# Altium PCB BSPDPCB.PcbDoc
Units mm, origin at the board's own origin, x right, y up, seen from the top; angles counter-clockwise.
Board outline 65.79 x 36.96 mm, 4 copper layers (Top Layer, GND, +5, Bottom Layer), stack 0.603 mm thick; 63 components, 31 nets, 200 pads, 118 vias.
Unrouted connection lines stored in the file: 95.
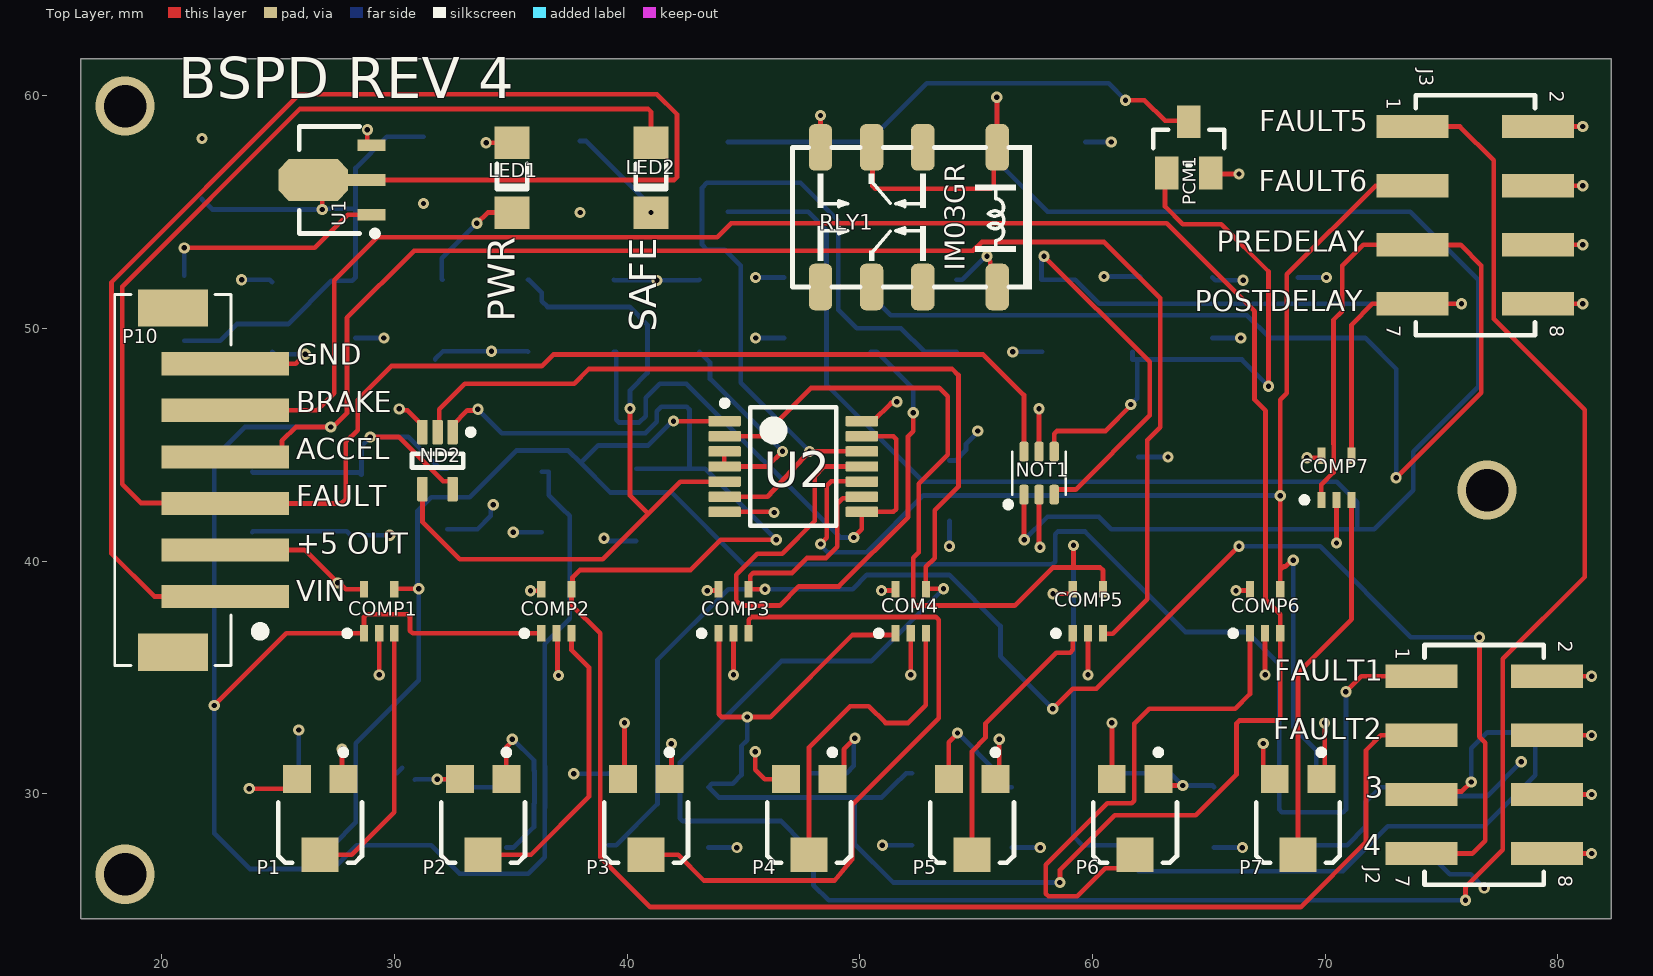
[diagram p0: Top Layer view]
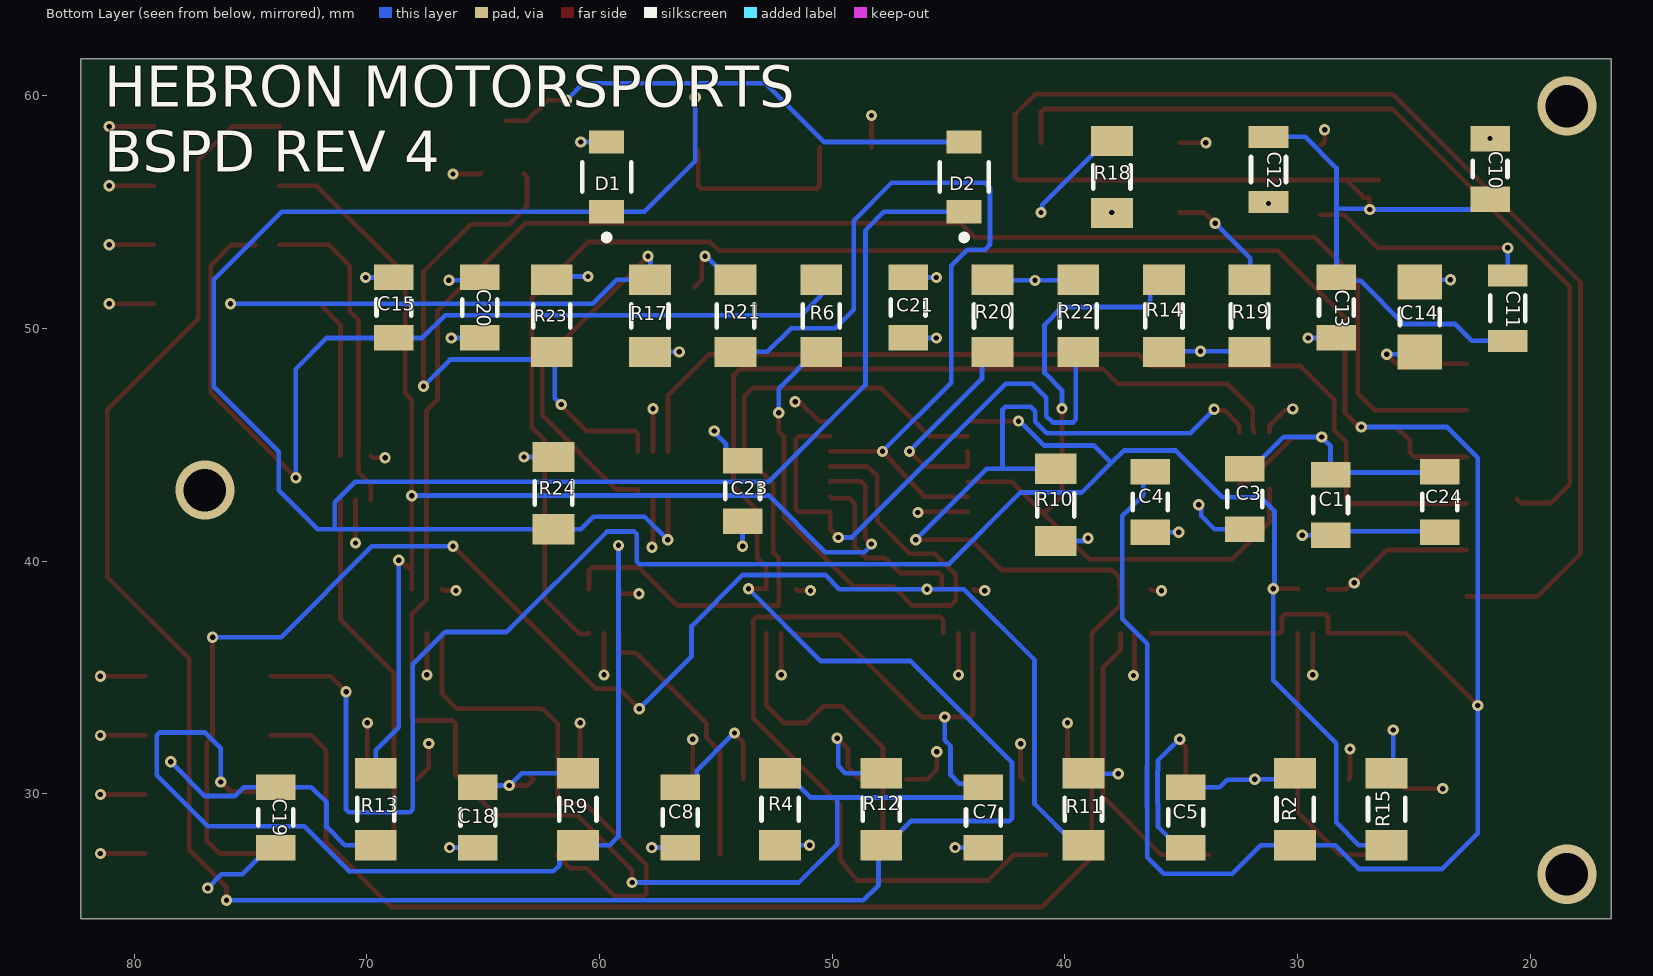
[diagram p1: Bottom Layer view, seen from below]
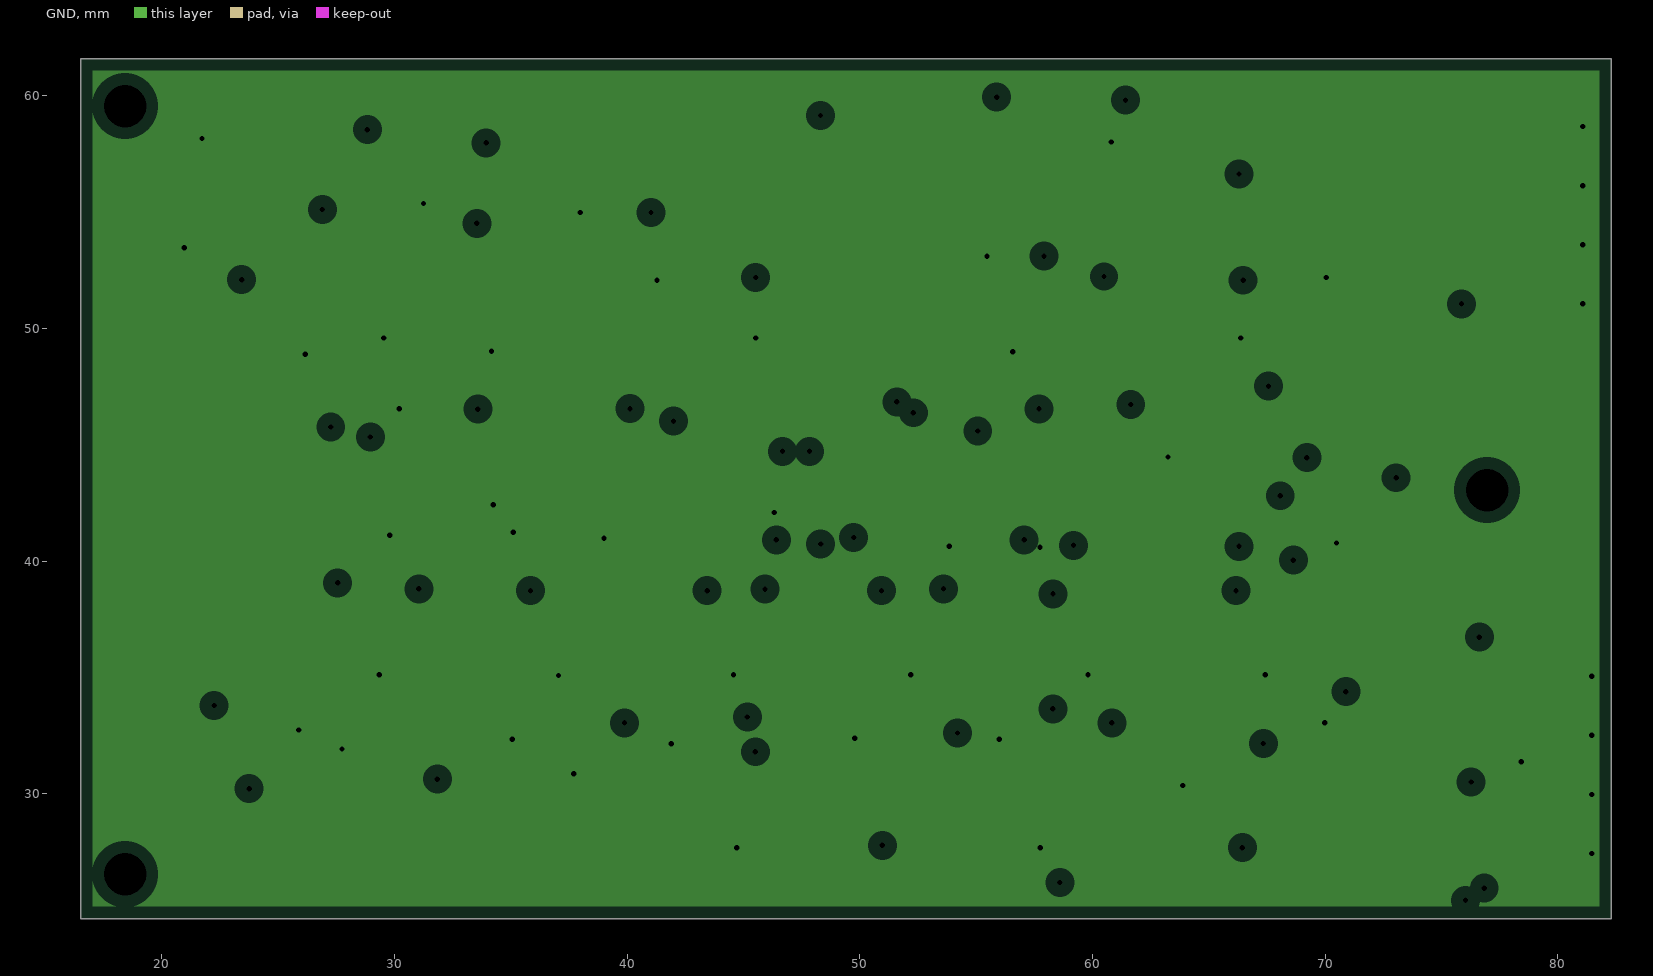
[diagram p2: GND, clearances drawn from the general rule]
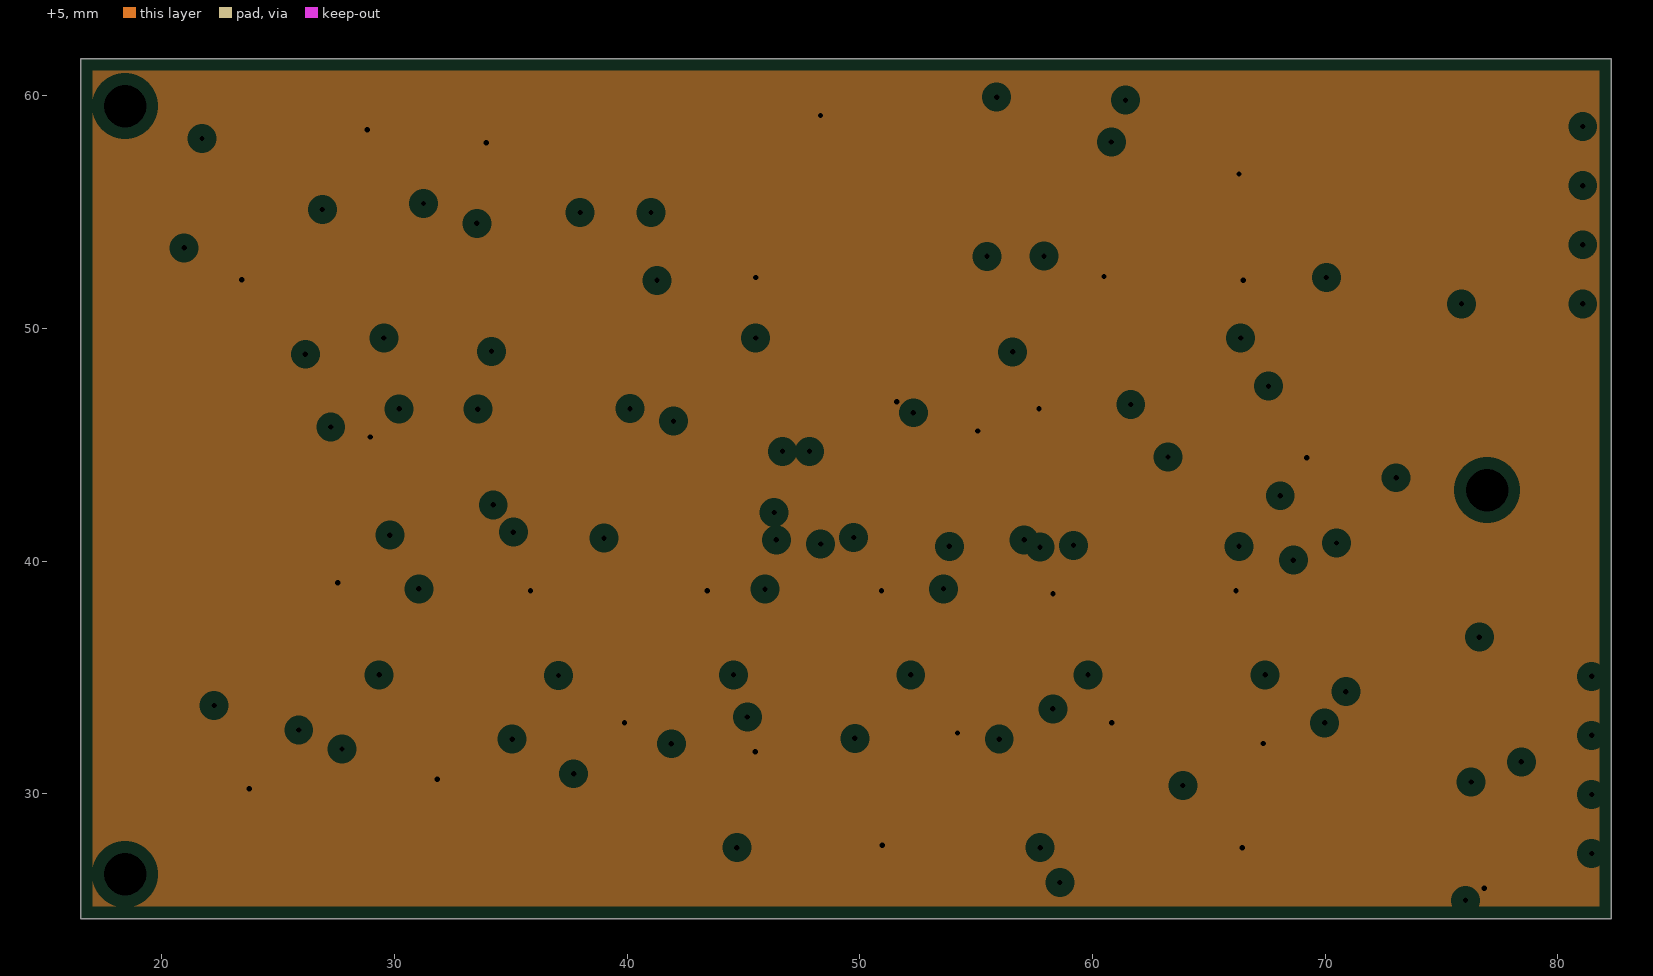
[diagram p3: +5, clearances drawn from the general rule]
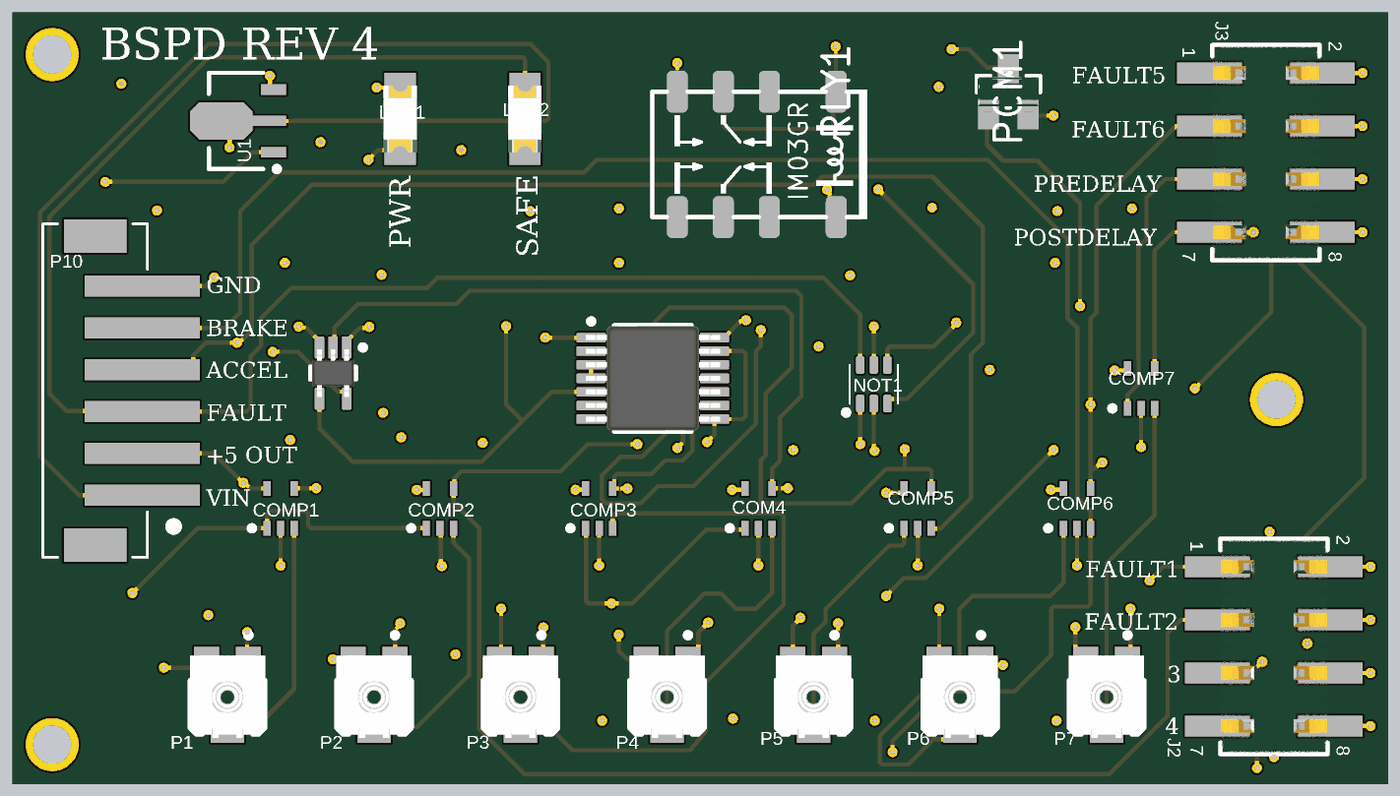
[diagram p4: 3D render of the assembled board from above, using the file's embedded part models]

## Layer stack, top to bottom
Top Solder: solder mask 0.0102, Solder Resist, Dk 3.5
Top Layer: signal copper 0.0356
Dielectric 2: prepreg 0.0711, PP-006, Dk 4.1
GND: plane copper 0.035, net GND
Dielectric 1: dielectric 0.32, FR-4, Dk 4.8
+5: plane copper 0.035, net +5
Dielectric 3: prepreg 0.0711, PP-006, Dk 4.1
Bottom Layer: signal copper 0.0356
Bottom Solder: solder mask 0.0102, Solder Resist, Dk 3.5

## Board outline
82.296,61.595 16.51,61.595 16.51,24.638 82.296,24.638

## Design rules (kind name [scope] priority, off if disabled: settings)
Clearance [All] p1: gap=0.254 ignorepadtopadclearanceinfootprint=TRUE except(1.27: SMDPad-SMDPad SMDPad-THPad SMDPad-Via THPad-THPad THPad-Via)
DiffPairsRouting [OnLayer('Top Layer')] p1: maxlimit=0.254 minlimit=0.254 mostfreqgap=0.254 toplayer_minwidth=0.381 toplayer_maxwidth=0.381 toplayer_prefwidth=0.381 bottomlayer_minwidth=0.381 bottomlayer_maxwidth=0.381 bottomlayer_prefwidth=0.381 maxuncoupledlength=12.7
PlaneClearance [All] p1: clearance=0.508
PlaneConnect [All] p1: planeconnectstyle=Relief reliefexpansion=0.508 reliefentries=4 reliefconductorwidth=0.254 reliefairgap=0.254
PolygonConnect [All] p1: connectstyle=Relief reliefconductorwidth=0.254 reliefentries=4 polygonreliefangle="90 Angle" airgapwidth=0.254
RoutingVias [All] p1: holewidth=0.229 width=0.483 viastyle="Through Hole" minholewidth=0.203 minwidth=0.457 maxholewidth=5.08 maxwidth=5.08
SMDNeckDown [All] p1 off: percent=50.000
SilkToSilkClearance [All] p1 off: silktosilkclearance=0.254
SolderMaskExpansion [All] p1: expansion=0.102 istentingtop=FALSE
UnRoutedNet [All] p1: checkbadconnections=TRUE
Width [All] p1: maxlimit=2.54 minlimit=0.102 preferedwidth=0.203 minimp=50.000000 maximp=50.000000 favimp=50.000000
25 further rules are at their usual default settings.

## Components (designator, comment, footprint, x,y, rotation, side; value= is the part's Value field where it differs from the comment)
C1 "1uF 1206" CAPC3216X152X50LL20T25 28.575,42.418 r90 bottom
C3 "1uF 1206" CAPC3216X152X50LL20T25 32.258,42.672 r90 bottom
C4 "1uF 1206" CAPC3216X152X50LL20T25 36.322,42.545 r90 bottom
C5 "1uF 1206" CAPC3216X152X50LL20T25 34.803,28.987 r90 bottom
C7 "1uF 1206" CAPC3216X152X50LL20T25 43.495,28.987 r90 bottom
C8 "1uF 1206" CAPC3216X152X50LL20T25 56.531,28.987 r90 bottom
C10 "1uF 1206" CAPC3216X152X50LL20T25 21.717,56.865 r270 bottom
C11 ".1uF 1206" CAPC1206(3216)190_L 20.955,50.871 r270 bottom value=100uF
C12 "100uF 1206" CAPC1206(3216)190_L 31.242,56.84 r90 bottom value=100uF
C13 "100uF 1206" CAPC3216X180X50LL20T25 28.321,50.896 r90 bottom
C14 "1uF 1206" CAPC3216X180X50ML20T25 24.738,50.496 r90 bottom
C15 "100uF 1206" CAPC3216X152X50LL20T25 68.834,50.896 r270 bottom
C18 "1uF 1206" CAPC3216X152X50LL20T25 65.223,28.987 r270 bottom
C19 "1uF 1206" CAPC3216X152X50LL20T25 73.914,28.987 r270 bottom
C20 "1uF 1206" CAPC3216X152X50LL20T25 65.151,50.896 r90 bottom
C21 "1uF 1206" CAPC3216X152X50LL20T25 46.736,50.896 r90 bottom
C23 "1uF 1206" CAPC3216X152X50LL20T25 53.848,43.023 r90 bottom
C24 "1uF 1206" CAPC3216X152X50LL20T25 23.876,42.545 r90 bottom
COM4 "ADCMP371AKSZ-REEL7" ADI-KS-5_L 52.186,37.846 r90 top
COMP1 "ADCMP371AKSZ-REEL7" ADI-KS-5_L 29.337,37.846 r90 top
COMP2 "ADCMP371AKSZ-REEL7" ADI-KS-5_L 36.953,37.846 r90 top
COMP3 "ADCMP371AKSZ-REEL7" ADI-KS-5_L 44.57,37.846 r90 top
COMP5 "ADCMP371AKSZ-REEL7" ADI-KS-5_L 59.802,37.846 r90 top
COMP6 "ADCMP371AKSZ-REEL7" ADI-KS-5_L 67.418,37.846 r90 top
COMP7 "ADCMP371AKSZ-REEL7" ADI-KS-5_L 70.485,43.583 r90 top
D1 "ACURN105-HF" FP-1206-MFG 59.69,56.515 r90 bottom
D2 "ACURN105-HF" FP-1206-MFG 44.323,56.515 r90 bottom
J2 "61000821121" 61000821121 76.835,31.242 r270 top
J3 "61000821121" 61000821121 76.454,54.87 r270 top
LED1 "150120GS75000" 1206_A 35.052,56.483 r90 top
LED2 "150120GS75000" 1206_A 41.021,56.483 r90 top
ND2 "SN74LVC1G08DCKR" DCK0005A_M 31.845,44.323 r270 top
NOT1 "NC7WZ04P6X" FAIR-SC70-6_V 57.053,42.86 r0 top
P1 "TC33X-2-103E" BOUR-TC33X-2_V 26.797,28.829 r270 top
P2 "TC33X-2-103E" BOUR-TC33X-2_V 33.803,28.829 r270 top
P3 "TC33X-2-103E" BOUR-TC33X-2_V 40.809,28.829 r270 top
P4 "TC33X-2-103E" BOUR-TC33X-2_V 47.816,28.829 r270 top
P5 "TC33X-2-103E" BOUR-TC33X-2_V 54.822,28.829 r270 top
P6 "TC33X-2-103E" BOUR-TC33X-2_V 61.828,28.829 r270 top
P7 "TC33X-2-103E" BOUR-TC33X-2_V 68.834,28.829 r270 top
P10 "B6B-PH-SM4-TB(LF)(SN)" *JST_B6B-PH-SM4-TB(LF)(SN) 22.721,43.482 r90 top
PCM1 "FDN340P" FP-527AG-MFG 64.135,57.785 r90 top
R2 "50k" RESC3216X60X45ML10T20 30.099,29.337 r270 bottom
R4 "50K" RESC3216X60X45ML10T20 52.236,29.337 r90 bottom
R6 "1206 1k" RESC3216X60X45ML10T20 50.469,50.546 r90 bottom
R9 "10k" RESC3216X60X45ML10T20 60.927,29.337 r90 bottom
R10 "10k" RESC3216X60X45ML10T20 40.386,42.418 r270 bottom
R11 "10k" RESC3216X60X45ML10T20 39.199,29.337 r90 bottom
R12 "10k" RESC3216X60X45ML10T20 47.89,29.337 r90 bottom
R13 "10k" RESC3216X60X45ML10T20 69.618,29.337 r270 bottom
R14 "10k" RESC3216X60X45ML10T20 35.737,50.546 r270 bottom
R15 "10k" RESC3216X60X45ML10T20 26.162,29.337 r90 bottom
R17 "10k" RESC3216X60X45ML10T20 57.835,50.546 r270 bottom
R18 "220" RESC3216X60X45ML10T20 37.973,56.515 r270 bottom
R19 "220" RESC3216X60X45ML10T20 32.054,50.546 r270 bottom
R20 "10k" RESC3216X60X45ML10T20 43.103,50.546 r90 bottom
R21 "10k" RESC3216X60X45ML10T20 54.152,50.546 r90 bottom
R22 "10k" RESC3216X60X45ML10T20 39.42,50.546 r90 bottom
R23 "10k" RESC3216X60X45ML10T20 62.05,50.546 r90 bottom
R24 "10k" RESC3216X60X45ML10T20 61.976,42.926 r90 bottom
RLY1 "IM03GR" TECO-IM-8G-WING 55.905,57.785 r90 top
U1 "MCP1703T-5003E/MB" SOT-89_L 27.305,56.385 r180 top
U2 "SN74HCT32PWR" PW0014A_N 47.135,44.069 r0 top

## Footprints (in the part's own frame and the unit in brackets; to place one, negate y for a bottom-side part, rotate by r counter-clockwise, add the part's x,y. Pads: shape width x height; smd on the part's side, far side on the other; paste and mask are expansions set on the pad)
1206_A [mm] "Chip LED, 2-Leads, Body 3.2x1.6mm, IPC Medium Density"
  rect 1.4x1.5 smd: 1(-1.5,0) 2(1.5,0)
  silkscreen extent -0.5,-0.67 0.6,0.65, body extent -1.6,-0.8 1.6,0.8, height 0.68
61000821121 [mm] "Pin Header, pitch 2.54 mm, SMD, Vertical, dual row, 8p"
  rect 1x3.1 smd: 1(-3.81,-2.7) 2(-3.81,2.7) 3(-1.27,-2.7) 4(-1.27,2.7) 5(1.27,-2.7) 6(1.27,2.7) 7(3.81,-2.7) 8(3.81,2.7)
  silkscreen extent -5.15,-2.56 5.15,2.56, body extent -5.08,-3.75 5.08,3.75, height 9.62
*JST_B6B-PH-SM4-TB(LF)(SN) [mm]
  rect 1x5.5 smd: 1(-5,0) 2(-3,0) 3(-1,0) 4(1,0) 5(3,0) 6(5,0)
  rect 1.6x3 smd: P1(-7.4,2.25) P2(7.4,2.25)
  silkscreen extent -7.97,-1.7 7.98,4.75
ADI-KS-5_L [mm] "SOT23, 5-Leads, Body 2x1.25mm, Pitch 0.65mm, IPC High Density"
  rect 0.7x0.35 smd: 1(-0.95,0.65) 2(-0.95,0) 3(-0.95,-0.65) 4(0.95,-0.65) 5(0.95,0.65)
  silkscreen extent -1.07,1.25 -0.83,1.5, body extent -0.67,-1.1 0.67,1.1, height 1.1
BOUR-TC33X-2_V [mm] "SMD, 3-Leads, Body 3.8x3.6mm"
  rect 1.2x1.2 smd: 1(-1.8,1) 3(-1.8,-1)
  rect 1.5x1.6 smd: 2(1.45,0)
  silkscreen extent -3.07,-1.8 1.8,1.8, body extent -2,-1.8 1.96,1.8, height 1.15
CAPC1206(3216)190_L [mm] "Chip Capacitor, Body 3.2x1.6mm, Height 1.9mm, IPC High Density"
  rect 0.95x1.7 smd: 1(-1.4,0) 2(1.4,0)
  silkscreen extent -0.55,-0.75 0.55,0.75, body extent -1.7,-0.9 1.7,0.9, height 1.9
CAPC3216X152X50LL20T25 [mm] "Chip Capacitor, 2-Leads, Body 3.20x1.60mm, IPC High Density"
  rect 1.1x1.7 smd: 1(-1.3,0) 2(1.3,0)
  silkscreen extent -0.35,-0.75 0.35,0.75, body extent -1.7,-0.9 1.7,0.9, height 1.52
CAPC3216X180X50LL20T25 [mm] "Chip Capacitor, 2-Leads, Body 3.20x1.60mm, IPC High Density"
  rect 1.1x1.7 smd: 1(-1.3,0) 2(1.3,0)
  silkscreen extent -0.35,-0.75 0.35,0.75, body extent -1.7,-0.9 1.7,0.9, height 1.8
CAPC3216X180X50ML20T25 [mm] "Chip Capacitor, 2-Leads, Body 3.40x1.80mm, IPC Low Density"
  rect 1.5x1.9 smd: 1(-1.5,0) 2(1.5,0)
  silkscreen extent -0.35,-0.85 0.35,0.85, body extent -1.7,-0.9 1.7,0.9, height 1.8
DCK0005A_M [mm] "SOT23, 5-Leads, Body 2.15x1.4mm, Pitch 0.65mm, IPC Low Density"
  rrect22% 1.05x0.45 smd: 1(-1.225,0.65) 2(-1.225,0) 3(-1.225,-0.65) 4(1.225,-0.65) 5(1.225,0.65)
  silkscreen extent -1.35,-1.1 0.3,1.55, body extent -1.14,-1 1.14,1, height 0.94
FAIR-SC70-6_V [mm] "SC70, 6-Leads, Body 2x1.25mm, Pitch 0.65mm"
  rrect50% 0.4x0.85 smd: 1(0,0) 2(0.65,0) 3(1.3,0) 4(1.3,1.85) 5(0.65,1.85) 6(0,1.85)
  silkscreen extent -0.8,-0.55 1.8,1.85, body extent -0.43,-0.38 1.73,2.22, height 1.1
FP-527AG-MFG [mm]
  rect 1.4x1 smd paste+0 mask+0: 1(-1.1,0.95) 2(-1.1,-0.95) 3(1.1,0)
  silkscreen extent -0.76,-1.52 0.76,1.52, body extent -1.9,-1.62 1.9,1.62, height 0.25
FP-1206-MFG [mm]
  rect 1x1.5 smd paste+0 mask+0: 1(-1.5,0) 2(1.5,0)
  silkscreen extent -2.72,-1.05 0.62,1.05, body extent -1.7,-0.95 1.7,0.95, height 1.16
PW0014A_N [mm] "SOP, 14-Leads, Body 5.1x4.5mm, Pitch 0.65mm, IPC Medium Density"
  rrect22% 1.4x0.45 smd: 1(-2.95,1.95) 2(-2.95,1.3) 3(-2.95,0.65) 4(-2.95,0) 5(-2.95,-0.65) 6(-2.95,-1.3) 7(-2.95,-1.95) 8(2.95,-1.95) 9(2.95,-1.3) 10(2.95,-0.65) 11(2.95,0) 12(2.95,0.65) 13(2.95,1.3) 14(2.95,1.95)
  silkscreen extent -3.07,-2.55 1.85,2.85, body extent -3.21,-2.5 3.21,2.5, height 1
RESC3216X60X45ML10T20 [mm] "Chip Resistor, 2-Leads, Body 3.20x1.60mm, IPC Low Density"
  rect 1.3x1.8 smd: 1(-1.55,0) 2(1.55,0)
  silkscreen extent -0.5,-0.8 0.5,0.8, body extent -1.65,-0.85 1.65,0.85, height 0.6
SOT-89_L [mm] "SOT89, 3-Leads, Body 4.5x2.4 mm, Pitch 1.5mm, Lead Span 4.1mm, IPC High Density"
  rect 1.2x0.5 smd: 1(-1.7,1.5) 3(-1.7,-1.5)
  rect 1.6x0.5 smd: 2(-1.5,0)
  oct 3x1.8 smd: 2(0.8,0)
  silkscreen extent -1.98,-2.3 1.4,2.42, body extent -1.2,-2.3 1.4,2.3, height 1.6
TECO-IM-8G-WING [mm] "Relay, 8-Leads, Body 10x6mm, Height 5.65mm, Pitch 2.2mm"
  rrect50% 2x1 smd paste+0 mask+0: 1(0,0) 2(0,3.2) 3(0,5.4) 4(0,7.6) 5(-6,7.6) 6(-6,5.4) 7(-6,3.2) 8(-6,0)
  silkscreen extent -6.1,-1.5 0.1,8.8, body extent -6.79,-1.02 0.7,8.64, height 3.8

## Part data
C1 C3 C4 C5 C7 C8 C10 C15 C18 C19 C20 C21 C23 C24: library part CMP-2000-05868-1, "Chip Capacitor, 330 nF, +/- 10%, 50 V, -55 to 125 degC, 1206 (3216 Metric), RoHS, Tape and Reel", Capacitance=330nF, Case Size/Dimension=1206, Dielectric=X7R, Manufacturer=AVX, Package Description="2-Pin Surface Mount Device, Body 3.2 x 1.6 mm", Rated Voltage=50V, Tolerance (%)=±10%, Datasheet URL=http://datasheets.avx.com/X7RDielectric.pdf, Datasheet Version=07/2016, Manufacturer URL=http://www.avx.com/, Mounting Technology=SurfaceMount, Package Reference=1206
C11 C12: library part CMP-1037-05005-1, "CAP 100uF 6.3V ±20% 1206 (3216 Metric) Thickness 1.9mm SMD", Case-EIA=1206, Case-Metric=3216, Rated Voltage="6.3 V", Tolerance=Â±20%, Max Thickness="1.9 mm", Technology=SMT
C13: library part CMP-2000-06014-1, "Chip Capacitor, 2.2 uF, +/- 10%, 16 V, -55 to 125 degC, 1206 (3216 Metric), RoHS, Tape and Reel", Capacitance=2.2uF, Capacitance - nF=2200nF, Case Code - in=1206, Case Code - mm=3216, Case Height=1mm, Case Length=3.2mm, Case Width=1.6mm, Dielectric=X7R, Manufacturer=Kemet, Maximum Operating Temperature=+125C, Minimum Operating Temperature=-55C, Operating Temperature Range=-55Cto+125C, Package / Case=1206(3216metric), Package Description="2-Pin Surface Mount Device, Body 3.2 x 1.6 mm", Temperature Coefficient / Code=+/-15%, Tolerance=10%, Voltage Rating=16V, Brand=Kemet, Class=Class1, Datasheet URL=http://www.kemet.com/docfinder?Partnumber=C1206C106K8RACTU, Datasheet Version=02/2016, Dimensions=1.6mmWx3.2mmLx1mmH, Dissipation Factor DF=5, Factory Pack Quantity=2000, Manufacturer URL=http://www.kemet.com/, Mounting Technology=SurfaceMount, Package Reference=1206, Packaging=Reel, Product=GeneralTypeMLCCs, Product Category=MultilayerCeramicCapacitorsMLCC-SMD/SMT, RoHS=Details, Series=C1206C, Termination Style=SMD/SMT, Type=SMDMLCCX7R6.3-250VDCCommericalGrade, Voltage Rating DC=16V
C14: library part CMP-2000-04991-1, "Chip Capacitor, 1 uF, +/- 10%, 25 V, -55 to 125 degC, 1206 (3216 Metric), RoHS, Tape and Reel", Capacitance=1uF, Capacitance - nF=1000nF, Case Code - in=1206, Case Code - mm=3216, Case Height=1.6mm, Case Length=3.2mm, Dielectric=X7R, Manufacturer=Kemet, Maximum Operating Temperature=+125C, Minimum Operating Temperature=-55C, Operating Temperature Range=-55Cto+125C, Package / Case=1206(3216metric), Package Description="2-Pin Surface Mount Device, Body 3.2 x 1.6 mm", Temperature Coefficient / Code=+/-15%, Tolerance=10%, Voltage Rating=25V, Brand=Kemet, Case Width=1.6mm, Class=Class1, Datasheet URL=https://ciiva.com/datasheet-click-18194173?src=ciiva&sig=6daff8c4, Datasheet Version=Jul-14, Dimensions=1.6mmWx3.2mmLx1.6mmH, Factory Pack Quantity=2000, Manufacturer URL=http://www.kemet.com/, Package Reference=1206, Packaging=Reel, Product=GeneralTypeMLCCs, Product Category=MultilayerCeramicCapacitorsMLCC-SMD/SMT, RoHS=Details, Series=C1206C, Termination Style=SMD/SMT, Type=SMDMLCCX7R6.3-250VDCCommericalGrade, Voltage Rating DC=25V
COM4 COMP1 COMP2 COMP3 COMP5 COMP6 COMP7: library part CMP-0783-00038-1, "General-Purpose Comparator, 2.25 to 5.5 V, 5 us Delay, Industrial, 5-pin SOT23 (KS-5), Reel", Manufacturer="Analog Devices", Supply Current=4uA, Voltage Supply (V)="2.25 to 5.5", Code_JEDEC=MO-203-AA, ComponentLink1Description="Manufacturer URL", ComponentLink1URL=http://www.analog.com/en/index.html, ComponentLink2Description=Datasheet, ComponentLink2URL=http://www.analog.com/static/imported-files/data_sheets/ADCMP370_371.pdf, ComponentLink3Description="Package Specification", ComponentLink3URL=http://www.analog.com/static/imported-files/packages/PKG_PDF/SC70(KS)/KS_5.pdf, ComponentLink4Description="URL Link1", ComponentLink4URL="Product URL:http://www.analog.com/en/special-linear-functions/comparators/adcmp371/products/product.html", ComponentLink5Description="URL Link2", ComponentLink5URL="Reference Circuit:http://www.analog.com/en/special-linear-functions/comparators/adcmp371/products/product.html#product-recommendations", DatasheetVersion="Rev. B", Input Range (V)="0 to VCC", Mounting Technology="Surface Mount", PackageDescription="5-Pin Thin Shrink Small Outline Transistor Package, Body 2 x 1.25 mm, Pitch 0.65 mm", PackageReference=KS-5, PackageVersion="072809-A, 07/2009", Packing=Reel, PartNumber=ADCMP371AKSZ-REEL7
D1 D2: library part CMP-20228-000003-1, "DIODE GEN PURP 1KV 1A 1206", Average Rectified Current=1A, Case Code (Imperial)=1206, Case Code (Metric)=3216, Case/Package=SMD/SMT, Forward Voltage=1.45V, Max Operating Temperature=175°C, Max Reverse Voltage (DC)=1kV, Max Surge Current=30A, Min Operating Temperature=-65°C, Package Quantity=3000, Peak Reverse Current=80nA, Forward Current=1A, Mount="Surface Mount", Packaging="Tape and Reel", Recovery Time=75ns, Reverse Recovery Time=75ns, Reverse Voltage (DC)=1kV
J2 J3: library part CMP-1502-01025-1, "SMT Vertical Pin Header WR-PHD, Pitch 2.54 mm, Dual Row, 8 pins", Contact Resistance=20mOhm, Manufacturer="Wurth Elektronik", Operating Temperature=-40to125degC, Rated Current=3A, Withstanding Voltage=500VAC, Working Voltage=250VAC, Datasheet URL=https://katalog.we-online.de/em/datasheet/6100xx21121.pdf, Gender=Male, Manufacturer URL=http://www.we-online.de, Mounting Technology=SMT, Orientation=Vertical, Package Reference=61000821121, Packaging=Tube, Part Number=61000821121, Pin Number=8, Pitch=2.54mm, Publisher=WurthElektronik, Row Number=Dual
LED1 LED2: library part CMP-1426-00014-1, "SMD mono-color Chip LED, WL-SMCW, Green", Color=Green, Manufacturer="Wuerth Elektronik", ComponentLink1Description="Manufacturer URL", ComponentLink1URL=http://www.we-online.com, ComponentLink2Description=Datasheet, ComponentLink2URL=http://katalog.we-online.com/led/datasheet/150120GS75000.pdf, PackageReference=1206_A, PartNumber=150120GS75000
ND2: library part CMP-0859-00266-3, "Single 2-Input Positive-AND Gate, DCK0005A, LARGE T&R", F @ Nom Voltage(Max)(Mhz)=150, Generic Part Number=SN74LVC1G08, ICC @ Nom Voltage(Max)(mA)=0.01, Manufacturer="Texas Instruments", Operating Temperature Range(C)="-40 to 125,-40 to 85", Rating=Catalog, tpd @ Nom Voltage(Max)(ns)=4.5,6,4,5, Voltage(Nom)(V)=1.8,2.5,3.3,5, 3-State Output=No, Bits(#)=1, DatasheetVersion=SCES217Y, Gate Type=AND, Input Type=CMOS/TTL, Logic=True, Output Drive (IOL/IOH)(Max)(mA)=32/-32, Output Type=CMOS, PackageReference=DCK0005A, Schmitt Trigger=No, Sub-Family="AND Gate", Technology Family=LVC, VCC(Max)(V)=5.5, VCC(Min)(V)=1.65
NOT1: library part CMP-2000-06821-1, "TinyLogic UHS Dual Inverter, 1.65 to 5.5 V, -40 to 85 degC, 6-Pin SOT23 (SC70), RoHS, Tape and Reel", Current - Output High, Low=32mA,32mA, Current - Quiescent (Max)=1µA, Manufacturer="Fairchild Semiconductor", Operating Temperature=-40°C~85°C, Package / Case=6-TSSOP,SC-88,SOT-363, Package Description="6-Pin Small Outline Transistor, Body 2 x 1.25 mm, Pitch 0.65 mm", Package Reference=SC70-6, Standard Package=1, Supplier Device Package=SC-70-6, Voltage - Supply=1.65V~5.5V, Category=IntegratedCircuits(ICs), Datasheet URL=https://www.fairchildsemi.com/datasheets/NC/NC7WZ04.pdf, Datasheet Version="Rev. 1.0.2, 12/2009", Dynamic Catalog=7WZ, Family=Logic-GatesandInverters, Features=-, Logic Level - High=-, Logic Level - Low=-, Logic Type=Inverter,Buffer, Manufacturer URL=https://www.fairchildsemi.com/, Max Propagation Delay @ V, Max CL=3.6ns@5V,50pF, Mounting Technology=SurfaceMount, Mounting Type=SurfaceMount, Number of Circuits=2, Number of Inputs=1, Other Names=NC7WZ04P6XDKR, Package URL=https://www.fairchildsemi.com/package-drawings/MA/MAA06A.pdf, Packaging=Digi-Reel®, Product Change Notification=MoldCompoundChange12/Dec/2007, Series=7WZ
P1 P2 P3 P4 P5 P6 P7: library part CMP-2100-03695-1, "Trimming Potentiometer, 10000 Ohm, -40 to 100 degC, 3-Pin SMD, RoHS, Tape and Reel", Case/Package=SMD/SMT, Colour=Silver, Manufacturer=Bourns, Max Operating Temperature=100degC, Max Power Dissipation=100mW, Min Operating Temperature=-40degC, Package Description="3-Pin Surface Mount Device, Body 3.8 x 3.6 mm", Package Quantity=2500, Package Reference=TC33X-2, Resistance=10KOhm, Temperature Coefficient=250ppm/degreesC, Tolerance=25%, Voltage Rating (DC)=50V, Composition=Potentiometer, Contact Plating=Silver, Datasheet URL=http://www.bourns.com/docs/Product-Datasheets/TC33.pdf, Datasheet Version=42583.0, Depth=3.8mm, Height=0.047inch, Lead Free=LeadFree, Length=3mm, Manufacturer URL=http://www.bourns.com/, Military Standard=Not, Mount=SurfaceMount, Number of Turns=1, Packaging=TapeandReel, Power Rating=100mW, Radiation Hardening=No, REACH SVHC=NoSVHC, RoHSCompliant=true, Taper=Linear, Termination=FootPrint, Weight=29.4mg, Width=0.118inch
P10: "Connector Header Surface Mount 6 position 0.079 _2.00mm_", Package=None, Availability=Unavailable, MF="JST Sales", MP=B6B-PH-SM4-TB_LF__SN_, Price=None, SnapEDA_Link=https://www.snapeda.com/parts/B6B-PH-SM4-TB%28LF%29%28SN%29/JST%20Sales%20America%20Inc./view-part/52131/?ref=snap
PCM1: library part CMP-2100-03638-2, "MOSFET P-CH 20V 2A SSOT3", Case/Package=SOT-23, Continuous Drain Current (ID)=2A, Current Rating=-2A, Drain to Source Breakdown Voltage=-20V, Drain to Source Resistance=60mR, Drain to Source Voltage (Vdss)=20V, Gate to Source Voltage (Vgs)=8V, Input Capacitance=779pF, Max Operating Temperature=150°C, Max Power Dissipation=500mW, Min Operating Temperature=-55°C, On-State Resistance=70MR, Package Quantity=1, Threshold Voltage=-800mV, Contact Plating=Tin, Dual Supply Voltage=-20V, Element Configuration=Single, Fall Time=11ns, Height=0.94mm, Lead Free="Lead Free", Length=2.92mm, Mount="Surface Mount", Nominal Vgs=-800mV, Number of Elements=1, Number of Pins=3, Packaging="Tape and Reel", Power Dissipation=500mW, Radiation Hardening=No, Rds On Max=70mR, REACH SVHC="No SVHC", Rise Time=9ns, Termination=SMD/SMT, Turn-Off Delay Time=27ns, Turn-On Delay Time=10ns, Voltage Rating (DC)=-20V, Weight=0.03g, Width=3.05mm
R2 R4 R6 R9 R10 R11 R12 R13 R14 R15 R17 R18 R19 R20 R21 R22 R23 R24: library part CMP-2003-01956-1, Manufacturer="Vishay Dale", Part Number=CRCW1206220RFKEA
RLY1: library part CMP-0439-00001-1, "Low Power Consumption, High Dielectric, High Mechanical Shock Resistance, IM Relay", Ambient Temperature="-40 to 85 degC", Coil-contact Capacitance="2 pF", Contact Capacitance="1 pF", Limiting Continuous Current="2 A", Manufacturer="TE Connectivity", Power Consumption="140 mW", ComponentLink1Description="Manufacturer URL", ComponentLink1URL=http://www.te.com/, ComponentLink2Description=Datasheet, ComponentLink2URL=http://www.te.com/commerce/DocumentDelivery/DDEController?Action=showdoc&DocId=Specification+Or+Standard%7F108-98001%7FS%7Fpdf%7FEnglish%7FENG_SS_108-98001_S.pdf%7F1-1462037-4, Contact Material="PdRu +Au Covered", DatasheetVersion="Rev. 0411", Mounting Technology="Surface Mount", PackageDescription="8-Pin Relay, 10 x 6 mm Body, 0.95 mm Pitch", PackageReference=IM-8G-WING, PartNumber=IM03GR
U1: library part CMP-0244-00395-1, "IC REG LINEAR 5V 100MA SOT89-3", ComponentLink1Description="Manufacturer URL", ComponentLink1URL=http://www.st.com, ComponentLink2Description=Datasheet, ComponentLink2URL=http://www.st.com/internet/com/TECHNICAL_RESOURCES/TECHNICAL_LITERATURE/DATASHEET/CD00000539.pdf, DatasheetVersion=1/07/2009, PackageDescription="3-Pin SOT-89 Package 1.5 mm Pitch, 4.1 mm Lead Span", PackageReference=SOT-89, PackageVersion=2011
U2: library part CMP-1573-00187-3, "Quadruple 2-Input Positive-OR Gates, PW0014A, LARGE T&R", F @ Nom Voltage(Max)(Mhz)=25, Generic Part Number=SN74HCT32, ICC @ Nom Voltage(Max)(mA)=0.02, Manufacturer="Texas Instruments", Operating Temperature Range(C)="-40 to 85", Rating=Catalog, tpd @ Nom Voltage(Max)(ns)=27, Voltage(Nom)(V)=5, Bits(#)=4, Code_JEDEC=MO-153, DatasheetVersion=SCLS064E, Input Type=TTL, Output Drive (IOL/IOH)(Max)(mA)=4/-4, Output Type=CMOS, PackageReference=PW0014A, PackageVersion=http://www.ti.com/lit/ml/mpds360/mpds360.pdf, VCC(Max)(V)=5.5, VCC(Min)(V)=4.5

## Via types
v1: diameter 0.483, hole 0.229, Top Layer to Bottom Layer, 114 vias
v2: diameter 2.54, hole 1.829, Top Layer to Bottom Layer, 3 vias
v3: diameter 0.457, hole 0.203, Top Layer to Bottom Layer, 1 vias

## Nets (pads, with @x,y where several pads share a name; then routed paths per layer and width w, separated by ;. In a path a pad name is that pad's centre, name@x,y a point inside that pad or via, vN(x,y) a via of type N, cw(c..) or ccw(c..) an arc to the next point about the centre after c; other vN are vias at no path point)
+5: C1.2 C3.2 C5.2 C8.2 C14.2 C18.2 C19.2 C20.2 C21.2 C23.2 C24.2 COM4.5 COMP1.5 COMP2.5 COMP3.5 COMP5.5 COMP6.5 COMP7.5 LED1.2 ND2.5 NOT1.5 P1.3 P2.3 P3.3 P4.3 P5.3 P6.3 P7.3 P10.2 PCM1.2 R2.1 R4.1 R23.2 RLY1.4 U1.3 U2.14 | length 69.4
  Top Layer w0.203: P10.2 26.138,40.482 v1(27.553,39.066) ; v1(23.751,30.222) 25.39,30.222 P1.3 ; v1@27.559,39.116 27.579,39.116 27.899,38.796 COMP1.5 ; v1(28.829,58.547) 28.829,58.033 28.977,57.885 U1.3 ; v1(28.956,45.339) 30.178,45.339 30.244,45.273 32.083,43.434 32.372,43.434 32.495,43.311 ND2.5 ; v1(31.835,30.629) P2.3 ; v1(33.934,57.983) LED1.2 ; v1(35.845,38.73) 36.238,38.73 COMP2.5 ; P3.3 39.878,30.698 v1(39.878,33.048) ; v1(43.434,38.735) 43.859,38.735 COMP3.5 ; v1(45.503,31.807) 45.503,31.036 45.911,30.629 P4.3 ; RLY1.4 v1(48.305,59.153) ; U2.14 50.56,46.019 51.339,46.797 51.536,46.797 v1(51.59,46.851) ; v1(50.927,38.735) 51.475,38.735 COM4.5 ; P5.3 53.822,32.216 54.194,32.589 v1(54.194,32.616) ; NOT1.5 v1(57.703,46.55) ; v1(58.298,38.596) 59.079,38.596 59.152,38.67 COMP5.5 ; P6.3 60.833,30.634 v1(60.833,33.048) ; PCM1.2 65.128,56.642 v1(66.294,56.642) ; v1(66.167,38.735) 66.707,38.735 COMP6.5 ; v1(67.342,32.162) 67.342,31.121 P7.3 ; v1(69.215,44.45) 69.762,44.45 69.835,44.523 COMP7.5
  Bottom Layer w0.203: v1(23.423,52.101) 24.633,52.101 C14.2 ; C24.2 23.906,43.815 27.07,43.815 28.478,43.815 C1.2 28.575,44.948 28.956,45.329 v1(28.956,45.339) 30.591,45.339 31.958,43.972 C3.2 ; R2.1 R2.1@30.327,31.115 ; R2.1@30.861,30.607 30.883,30.629 v1(31.835,30.629) 31.857,30.607 33.02,30.607 33.34,30.287 C5.2 ; v1(45.518,52.196) C21.2 ; v1(50.967,27.787) R4.1 ; C23.2 54.112,44.323 54.56,44.771 54.56,45.035 55.066,45.541 v1(55.066,45.593) ; v1@54.229,32.512 54.246,32.529 54.29,32.529 55.819,30.999 55.819,30.735 56.268,30.287 C8.2 ; v3@60.452,52.197 v3(60.491,52.236) R23.2@62.05,52.236 ; C20.2 65.272,52.075 v1(66.473,52.075) ; C18.2 v1(66.441,27.687) ; C19.2 74.214,27.687 75.363,26.538 76.247,26.538 v1(76.839,25.947)
+12: C10.2 C11.2 C12.2 C13.2 P10.1 U1.2 | length 89
  Top Layer w0.203: P10.1 19.677,38.482 17.831,40.328 17.831,51.994 25.908,60.071 41.275,60.071 42.139,59.207 42.139,56.507 42.02,56.388 29.956,56.388 29.953,56.385 28.805,56.385 27.94,56.385 U1.2@26.505,56.385 ; v1(26.894,55.118) 26.894,55.587 26.93,55.623 27.178,55.623 27.178,55.66 U1.2@27.903,56.385
  Bottom Layer w0.203: C11.2 22.504,49.471 23.224,50.19 25.425,50.19 27.285,52.05 28.175,52.05 C13.2 28.321,55.143 ; C10.2 22.164,55.118 v1(26.894,55.118) 26.919,55.143 28.321,55.143 ; C12.2 29.665,58.24 28.321,56.896 28.321,55.143
ACCEL_IN: C4.2 COMP1.1 COMP2.1 COMP5.3 P10.4 R2.2 | length 135.5
  Top Layer w0.203: v1@22.225,33.782 22.239,33.796 v1(22.246,33.796) 25.346,36.896 COMP1.1 28.687,37.6 28.806,37.719 30.539,37.719 30.658,37.6 30.658,37.015 30.777,36.896 COMP2.1 ; P10.4 24.971,44.482 25.159,44.671 25.159,45.168 25.762,45.771 v1(27.254,45.771) ; v1@27.414,45.829 27.953,46.368 27.953,50.457 30.836,53.34 54.86,53.34 55.237,53.717 60.507,53.717 62.915,51.308 62.915,45.766 62.357,45.207 62.357,38.366 60.872,36.881 60.526,36.881 60.51,36.896 COMP5.3
  Bottom Layer w0.203: v1(27.254,45.771) 23.571,45.771 22.25,44.45 22.25,28.296 23.774,26.772 27.356,26.772 28.372,27.787 R2.2 31.572,27.787 32.791,26.568 35.738,26.568 36.449,27.28 36.449,29.383 36.466,29.4 36.466,31.174 36.449,31.191 36.449,36.449 37.528,37.528 37.528,41.942 37.216,42.254 36.627,42.843 36.627,43.845 C4.2
BRAKE_IN: C7.2 COM4.1 COMP3.1 COMP6.3 P10.5 R4.2 | length 121.6
  Top Layer w0.203: P10.5 26.67,46.482 27.407,47.219 27.407,52.07 29.261,53.924 43.868,53.924 44.464,54.52 63.183,54.52 66.967,50.736 66.967,46.938 67.437,46.468 67.437,38.35 68.068,37.719 COMP6.3 68.068,33.266 67.949,33.147 66.309,33.147 66.19,33.028 66.19,30.834 64.44,29.083 60.96,29.083 58.598,26.721 v1(58.598,26.187) ; COMP3.1 43.942,36.874 43.942,33.418 44.061,33.299 v1(45.161,33.299) 46.152,33.299 49.682,36.83 51.47,36.83 COM4.1
  Bottom Layer w0.203: v1(45.161,33.299) 45.161,32.309 44.906,32.055 44.906,30.809 44.53,30.433 43.641,30.433 C7.2 43.937,29.845 49.784,29.845 ; R4.2 51.986,30.887 51.437,30.339 50.944,29.845 49.784,29.845 ; v1(58.598,26.187) 51.435,26.187 49.784,27.838 49.784,29.845
FAULT1: COMP1.4 J2.1 R15.1 U2.1 | length 86.7
  Top Layer w0.203: COMP1.4 29.987,38.811 v1(31.039,38.811) ; v1(41.986,46.019) U2.1 ; v1(70.891,34.392) 71.552,35.052 J2.1
  Bottom Layer w0.203: R15.1 27.355,27.787 28.335,28.767 28.335,32.171 31.039,34.874 v1(31.039,38.811) 30.988,38.862 30.988,42.164 31.572,42.748 33.223,42.748 35.23,44.755 37.465,44.755 37.998,44.221 ; v1(41.986,46.019) 41.943,46.019 40.898,44.974 38.751,44.974 37.998,44.221 ; v1(70.891,34.392) 70.891,29.329 70.772,29.21 68.14,29.21 68.021,29.329 68.021,35.56 66.624,36.957 63.991,36.957 59.673,41.275 58.514,41.275 58.395,41.156 58.395,39.984 58.276,39.865 44.996,39.865 41.91,42.951 39.268,42.951 37.998,44.221
FAULT2: COMP2.4 J2.3 ND2.1 R10.1 | length 85.3
  Top Layer w0.203: ND2.1 32.495,45.848 33.127,46.479 33.525,46.479 v1(33.579,46.533) ; v1(46.406,40.919) 44.018,40.919 42.723,39.624 37.973,39.624 37.649,39.3 37.649,38.842 COMP2.4 37.603,38.13 38.837,36.897 38.837,27.28 40.983,25.133 68.948,25.133 71.755,27.94 71.755,31.877 72.39,32.512 J2.3
  Bottom Layer w0.203: v1(33.579,46.533) 34.608,45.504 40.782,45.504 41.268,45.991 41.268,46.437 41.465,46.634 42.553,46.634 42.672,46.515 42.672,43.968 ; R10.1 41.91,43.968 42.672,43.968 ; v1(46.406,40.919) 43.357,43.968 42.672,43.968
FAULT3: COMP5.4 J2.5 R9.1 U2.2 | length 74.3
  Top Layer w0.203: U2.2 45.822,45.369 47.9,47.448 53.416,47.448 53.779,47.084 53.779,44.577 52.527,43.325 52.527,40.373 52.299,40.144 52.299,38.09 56.658,38.09 58.293,39.726 59.182,39.726 ; v1(59.182,40.678) 59.182,39.726 ; COMP5.4 60.452,39.607 60.333,39.726 59.182,39.726 ; J2.5 74.263,30.1 75.871,30.1 v1(76.276,30.505)
  Bottom Layer w0.203: v1(59.182,40.678) 59.182,28.169 59.564,27.787 61.166,27.787 61.714,27.239 61.714,26.932 61.976,26.67 70.764,26.67 72.695,28.6 76.835,28.6 79.028,30.793 79.028,32.52 78.909,32.639 76.962,32.639 76.276,31.953 v1(76.276,30.505)
FAULT4: COMP3.4 J2.7 R11.1 U2.9 | length 74
  Top Layer w0.203: v1(45.923,38.796) COMP3.4 45.293,38.869 45.293,39.375 45.412,39.494 47.088,39.494 47.731,40.137 48.55,40.137 49.029,40.616 49.029,42.462 49.267,42.7 50.016,42.7 U2.9 ; v1(58.293,33.655) 59.152,34.514 60.168,34.514 v1(66.294,40.64) ; J2.7 76.327,27.432 76.886,27.991 76.886,32.195 76.63,32.451 v1(76.63,36.732)
  Bottom Layer w0.203: R11.1 39.522,27.787 41.3,29.565 41.3,35.757 44.339,38.796 v1(45.923,38.796) 49.689,38.796 50.301,39.408 53.841,39.408 56.04,37.209 56.04,35.908 v1(58.293,33.655) ; v1(66.294,40.64) 69.78,40.64 73.688,36.732 v1(76.63,36.732)
FAULT5: COM4.4 J3.1 ND2.2 R12.1 | length 127.3
  Top Layer w0.203: ND2.2 31.915,45.617 31.915,46.52 33.02,47.625 37.719,47.625 38.354,48.26 53.975,48.26 54.236,47.999 54.236,43.209 53.213,42.186 53.213,40.132 52.836,39.755 COM4.4@52.836,38.811 ; COM4.4 COM4.4@52.836,38.811 ; v1(53.594,38.811) COM4.4@52.836,38.811 ; J3.1 75.794,58.68 77.248,57.225 77.248,50.413 77.457,50.204 81.153,46.508 81.153,39.319 77.629,35.796 77.629,27.59 76.028,25.988 v1(76.028,25.421)
  Bottom Layer w0.203: v1(53.594,38.811) 50.491,35.708 46.63,35.708 42.266,31.344 42.266,28.948 42.385,28.829 46.609,28.829 47.092,28.347 47.092,28.335 47.64,27.787 R12.1 48.004,27.673 48.004,26.078 48.661,25.421 v1(76.028,25.421)
FAULT6: COMP6.4 J3.3 R13.1 U2.10 | length 56.1
  Top Layer w0.203: v1(48.311,40.742) 48.572,41.003 48.572,43.246 48.76,43.434 50.07,43.434 U2.10 ; COMP6.4 68.068,39.624 68.068,40.738 68.072,40.742 v1@68.072,42.812 ; v1(68.068,42.812) 68.068,46.938 68.351,47.221 68.351,52.324 72.167,56.14 J3.3 ; 68.072,39.624 68.216,39.768 68.28,39.768 68.555,40.043 v1(68.631,40.043)
  Bottom Layer w0.203: v1(48.311,40.742) 48.311,40.683 48.608,40.386 50.292,40.386 52.73,42.824 68.056,42.824 v1(68.068,42.812) ; v1(68.631,40.043) 68.631,32.868 69.621,31.877 69.621,30.887 R13.1
FAULT_OUT: LED2.2 NOT1.6 P10.3 | length 80.8
  Top Layer w0.203: P10.3@20.574,42.672 20.404,42.502 19.093,42.502 18.288,43.307 18.288,51.804 25.92,59.436 40.902,59.436 41.021,59.317 LED2.2 ; P10.3 27.712,42.482 27.902,42.672 27.902,45.129 28.41,45.637 28.41,46.939 29.858,48.387 36.322,48.387 36.817,48.882 55.308,48.882 57.053,47.138 NOT1.6
GND: C1.1 C3.1 C4.1 C5.1 C7.1 C8.1 C10.1 C11.1 C12.1 C13.1 C14.1 C15.1 C18.1 C19.1 C20.1 C21.1 C23.1 C24.1 COM4.2 COMP1.2 COMP2.2 COMP3.2 COMP5.2 COMP6.2 COMP7.2 D1.2 J2.2 J2.4 J2.6 J2.8 J3.2 J3.4 J3.6 J3.8 ND2.3 NOT1.2 P1.1 P2.1 P3.1 P4.1 P5.1 P6.1 P7.1 P10.6 R9.2 R10.2 R11.2 R12.2 R13.2 R14.2 R15.2 R17.2 R18.2 R19.2 R20.2 R21.2 R22.2 R24.2 RLY1.8 U1.1 U2.7 | length 123.3
  Top Layer w0.203: v1(20.955,53.467) 26.57,53.467 27.988,54.885 U1.1 ; P10.6 25.749,48.482 v1(26.162,48.895) ; v1(27.738,31.925) 27.738,30.688 P1.1 ; v1(29.337,35.111) COMP1.2 ; v1(30.199,46.545) 30.252,46.491 30.552,46.491 31.195,45.848 ND2.3 ; P2.1 34.803,32.009 v1@35.052,32.258 ; COMP2.2 37,36.85 37,35.13 v1(37.046,35.084) ; P3.1 41.897,30.717 v1(41.897,32.151) ; U2.7 46.286,42.119 v1(46.314,42.092) ; v1(44.57,35.111) COMP3.2 ; P4.1 49.314,31.127 49.314,31.915 v1(49.784,32.385) ; v1(52.186,35.111) COM4.2 ; v1(55.466,53.102) 55.466,53.027 55.598,52.895 55.598,52.092 RLY1.8 ; P5.1 55.991,30.798 v1(55.991,32.348) ; NOT1.2 57.703,40.637 v1(57.738,40.602) ; v1(59.802,35.111) COMP5.2 ; P6.1@63.022,30.823 P6.1 63.104,30.353 v1@63.754,30.353 ; v1(67.418,35.111) COMP6.2 ; P7.1 69.977,30.772 v1(69.977,33.048) ; v1(70.485,40.779) COMP7.2 ; J3.8 v1(81.072,51.06) ; J3.6 v1(81.072,53.6) ; J3.4 v1(81.072,56.14) ; J3.2 v1(81.072,58.68) ; J2.8 v1(81.453,27.432) ; J2.6 v1(81.453,29.972) ; J2.4 v1(81.453,32.512) ; J2.2 v1(81.453,35.052)
  Bottom Layer w0.203: C11.1 v1(20.955,53.467) ; C24.1 23.912,41.281 27.934,41.281 C1.1@28.067,41.148 ; C14.1 24.839,48.895 v1(26.162,48.895) ; v1(25.88,32.74) 25.88,31.169 R15.2 ; C13.1 v1(29.539,49.596) ; C1.1 v1(29.793,41.118) ; R19.2@31.75,48.666 31.75,48.692 32.08,49.022 35.711,49.022 R14.2 ; C3.1 33.563,41.372 34.134,41.942 34.134,42.239 34.24,42.345 v1(34.24,42.42) ; C5.1 35.103,27.687 35.992,28.576 35.992,29.573 36.009,29.59 36.009,30.984 35.992,31.001 35.992,31.445 35.089,32.348 v1(35.052,32.348) ; v1(35.104,41.245) C4.1 ; v1(37.698,30.861) 39.173,30.861 R11.2 ; R18.2 v1(37.973,54.991) ; v1(38.999,40.986) 39.075,40.986 39.193,40.868 R10.2 ; R22.2 39.446,52.07 43.077,52.07 R20.2 ; C7.1 v1(44.713,27.687) ; v1(45.518,49.596) C21.1 ; R12.2 49.429,30.887 49.741,31.199 49.741,32.342 v1(49.784,32.385) ; v1(53.848,40.64) C23.1 ; R21.2 54.402,52.096 55.372,53.066 v1@55.372,53.086 ; C8.1 v1(57.75,27.687) ; v1(56.567,48.996) R17.2 ; D1.2 v1(60.808,58.015) ; R9.2 63.347,30.887 v1(63.881,30.353) 65.157,30.353 C18.1 ; R24.2 v1(63.244,44.476) ; C20.1 v1(66.369,49.596) ; C15.1 v1(70.052,52.196) ; R13.2 70.942,27.787 71.73,28.575 71.73,29.627 72.39,30.287 C19.1 75.296,30.287 75.679,29.904 76.96,29.904 v1(78.431,31.375)
  other v1: 34.163,49.022 41.275,52.07 31.242,55.372 21.717,58.166
NetCOM4_3: COM4.3 P4.2 | length 14.1
  Top Layer w0.203: P4.2 47.816,32.004 49.577,33.766 50.381,33.766 51.101,33.045 52.07,33.045 52.836,33.811 COM4.3
NetCOMP1_3: COMP1.3 P1.2 | length 11.6
  Top Layer w0.203: P1.2 28.156,27.379 29.987,29.21 COMP1.3
NetCOMP2_3: COMP2.3 P2.2 | length 12.9
  Top Layer w0.203: P2.2 35.863,27.379 38.354,29.87 38.354,35.433 37.603,36.184 COMP2.3
NetCOMP3_3: COMP3.3 P3.2 | length 30.4
  Top Layer w0.203: P3.2 42.192,27.379 43.297,26.273 48.92,26.273 49.657,27.178 49.657,29.515 53.391,33.249 53.391,37.473 53.262,37.602 45.348,37.602 45.22,37.473 COMP3.3
NetCOMP5_1: COMP5.1 P5.2 | length 11.7
  Top Layer w0.203: P5.2 54.822,31.835 55.397,32.41 55.397,33.02 58.445,36.068 59.033,36.068 59.152,36.187 COMP5.1
NetCOMP6_1: COMP6.1 P6.2 | length 22.2
  Top Layer w0.203: P6.2 61.246,26.797 60.546,26.797 60.427,26.678 60.427,26.67 59.347,25.59 58.107,25.59 57.988,25.71 57.988,26.949 60.63,29.591 61.679,29.591 61.798,29.71 61.798,33.02 62.433,33.655 66.133,33.655 66.768,34.29 COMP6.1
NetCOMP7_3: COMP7.3 P7.2 | length 16.2
  Top Layer w0.203: P7.2 68.834,35.204 71.135,37.505 COMP7.3
NetD1_1: D1.1 D2.1 NOT1.1 R24.1 RLY1.1 RLY1.3 | length 103.9
  Top Layer w0.203: RLY1.3 50.546,57.744 50.546,56.126 50.665,56.007 55.634,56.007 55.753,56.126 55.753,57.633 RLY1.1 55.892,57.797 55.892,59.932 v1(55.88,59.944) ; NOT1.1 57.053,40.928 v1(57.061,40.919)
  Bottom Layer w0.203: D2.1 47.779,55.015 48.565,54.229 48.565,47.574 52.73,43.409 70.493,43.409 71.374,42.528 71.374,41.402 ; v1(55.88,59.944) 55.88,57.201 58.066,55.015 D1.1 73.661,55.015 76.581,52.095 76.581,47.498 73.787,44.704 73.787,43.053 72.11,41.376 71.374,41.376 R24.1 60.809,41.376 60.275,41.91 58.064,41.91 57.074,40.919 v1(57.061,40.919)
NetD2_2: D2.2 PCM1.3 | length 21.4
  Top Layer w0.203: v1(61.417,59.817) 62.23,59.817 63.119,58.928 PCM1.3@64.008,58.928
  Bottom Layer w0.203: D2.2 50.344,58.015 52.87,60.541 60.693,60.541 v1(61.417,59.817)
NetLED1_1: LED1.1 R19.1 | length 4.8
  Top Layer w0.203: v1(33.537,54.521) 33.999,54.983 LED1.1
  Bottom Layer w0.203: R19.1 32.029,52.121 32.029,53.014 v1(33.537,54.521)
NetLED2_1: LED2.1 R18.1 | length 4.5
  Bottom Layer w0.203: R18.1 38.223,58.065 40.968,55.32 40.968,55.044 v1(41.021,54.991)
NetND2_4: ND2.4 R14.1 U2.5 | length 31.4
  Top Layer w0.203: ND2.4 31.195,41.686 31.317,41.565 32.8,40.081 38.938,40.081 40.894,42.037 ; v1(40.119,46.558) 40.119,42.812 40.894,42.037 ; U2.5 42.276,43.419 40.894,42.037
  Bottom Layer w0.203: R14.1 35.774,52.096 36.322,51.548 36.322,51.181 36.576,50.927 40.107,50.927 40.869,50.165 40.869,48.093 40.119,47.343 v1(40.119,46.558)
NetNOT1_4: NOT1.4 PCM1.1 R23.1 | length 25.3
  Top Layer w0.203: NOT1.4 58.353,45.474 58.472,45.593 60.554,45.593 v1@61.697,46.736 ; PCM1.1@63.246,56.642 63.119,56.515 63.119,55.245 63.881,54.483 65.532,54.483 67.564,52.451 v1(67.564,47.523)
  Bottom Layer w0.203: v1(61.643,46.736) 61.664,46.736 61.923,46.995 61.923,48.666 61.719,48.666 R23.1@61.719,48.996 ; R23.1@61.976,48.666 66.421,48.666 v1(67.564,47.523)
NetR6_1: R6.1 U2.11 | length 26.7
  Top Layer w0.203: U2.11 48.478,44.069 48.057,43.648 48.057,41.726 46.653,40.322 45.594,40.322 44.689,39.417 44.689,38.299 44.897,38.09 46.545,38.09 47.367,38.913 49.098,38.913 52.07,41.885 52.07,45.364 52.299,45.593 v1(52.299,46.38)
  Bottom Layer w0.203: R6.1 50.719,48.996 52.299,47.416 v1(52.299,46.38)
NetR20_1: R20.1 U2.3 U2.4 | length 9.2
  Top Layer w0.203: U2.3 44.171,44.719 44.171,44.069 U2.4 46.025,44.069 v1(46.675,44.72)
  Bottom Layer w0.203: R20.1 43.561,48.538 43.561,47.834 v1(46.675,44.72)
NetR21_1: R21.1 U2.6 U2.12 | length 36.7
  Top Layer w0.203: U2.6 46.028,42.769 v1(47.834,44.719) U2.12
  Bottom Layer w0.203: v1(47.834,44.719) 44.882,47.671 44.882,52.705 44.196,53.391 43.426,53.391 43.217,53.599 43.217,56.052 43.426,56.261 47.447,56.261 49.073,54.635 49.073,50.8 49.86,50.013 51.765,50.013 52.781,48.996 R21.1
NetR22_1: R22.1 U2.8 U2.13 | length 24.5
  Top Layer w0.203: v1(49.733,41.021) 50.085,41.373 U2.8 51.443,42.119 51.562,42.238 51.562,45.25 51.443,45.369 U2.13
  Bottom Layer w0.203: R22.1 39.522,48.996 39.522,46.08 39.641,45.961 40.516,45.961 40.792,46.237 40.792,47.015 41.402,47.625 42.545,47.625 49.149,41.021 v1(49.733,41.021)
POST_DELAY: COMP7.4 J3.7 NOT1.3 R17.1 | length 44.7
  Top Layer w0.203: v1(57.912,53.111) 62.458,48.565 62.458,46.266 59.271,43.078 58.353,43.078 NOT1.3 ; COMP7.4 71.135,50.165 72.03,51.06 v1(75.857,51.06)
  Bottom Layer w0.203: v1(57.912,53.111) 57.81,53.111 57.81,52.096 R17.1 59.258,52.096 60.294,51.06 v1(75.857,51.06)
PRE_DELAY: C15.2 COMP7.1 J3.5 R6.2 | length 56
  Top Layer w0.203: COMP7.1 69.835,43.292 70.358,43.815 70.358,44.028 70.366,44.035 70.366,45.03 70.358,45.038 70.358,50.368 70.739,50.749 70.739,52.705 71.634,53.6 J3.5 ; v1(73.05,43.586) 76.708,47.244 76.708,52.705 75.819,53.594 J3.5@74.803,53.594
  Bottom Layer w0.203: R6.2 50.469,51.435 51.333,50.571 66.639,50.571 67.615,49.596 C15.2 71.714,49.596 73.05,48.26 v1(73.05,43.586)
pads on no net: P10.P1 P10.P2 RLY1.2 RLY1.5 RLY1.6 RLY1.7
copper on no net:
  other v2: 18.415,26.543 76.962,43.053 18.415,59.563

## Polygon pours and split planes (outlines as drawn)
GND on GND (split plane): 81.786,61.085 81.786,25.148 17.02,25.148 17.02,61.085
+5 on +5 (split plane): 81.786,61.085 81.786,25.148 17.02,25.148 17.02,61.085

## Silkscreen, mask and mechanical layers (free items; w line width, h text height)
Top Overlay:
  text "BSPD REV 4" at 20.701,59.326 h3
  text "FAULT5" at 67.168,58.184 h1.52
  text "FAULT6" at 67.146,55.602 h1.52
  text "PREDELAY" at 65.342,53.001 h1.52
  text "POSTDELAY" at 64.389,50.437 h1.52
  text "PWR" at 35.56,50.292 h2 r90
  text "SAFE" at 41.634,49.862 h2 r90
  text "GND" at 25.781,48.151 h1.52
  text "BRAKE" at 25.781,46.101 h1.52
  text "ACCEL" at 25.781,44.086 h1.52
  text "FAULT" at 25.781,42.055 h1.52
  text "+5 OUT" at 25.781,40.023 h1.52
  text "VIN" at 25.781,37.973 h1.52
  text "FAULT1" at 67.818,34.562 h1.52
  text "FAULT2" at 67.767,32.046 h1.52
  text "3" at 71.723,29.53 h1.52
  text "4" at 71.634,27.051 h1.52
Bottom Overlay:
  text "HEBRON MOTORSPORTS" at 81.28,58.945 h3
  text "BSPD REV 4" at 81.28,56.151 h3

## Text inside footprints (layer, text, board x,y; h text height)
J2: Top Overlay "1" at 72.835,36.282 h1.02 r270; Top Overlay "2" at 79.835,36.582 h1.02 r270; Top Overlay "7" at 72.835,26.502 h1.02 r270; Top Overlay "8" at 79.835,26.502 h1.02 r270
J3: Top Overlay "8" at 79.454,50.13 h1.02 r270; Top Overlay "7" at 72.454,50.13 h1.02 r270; Top Overlay "2" at 79.454,60.21 h1.02 r270; Top Overlay "1" at 72.454,59.91 h1.02 r270